# EAGLE board xio (EAGLE 5.02)
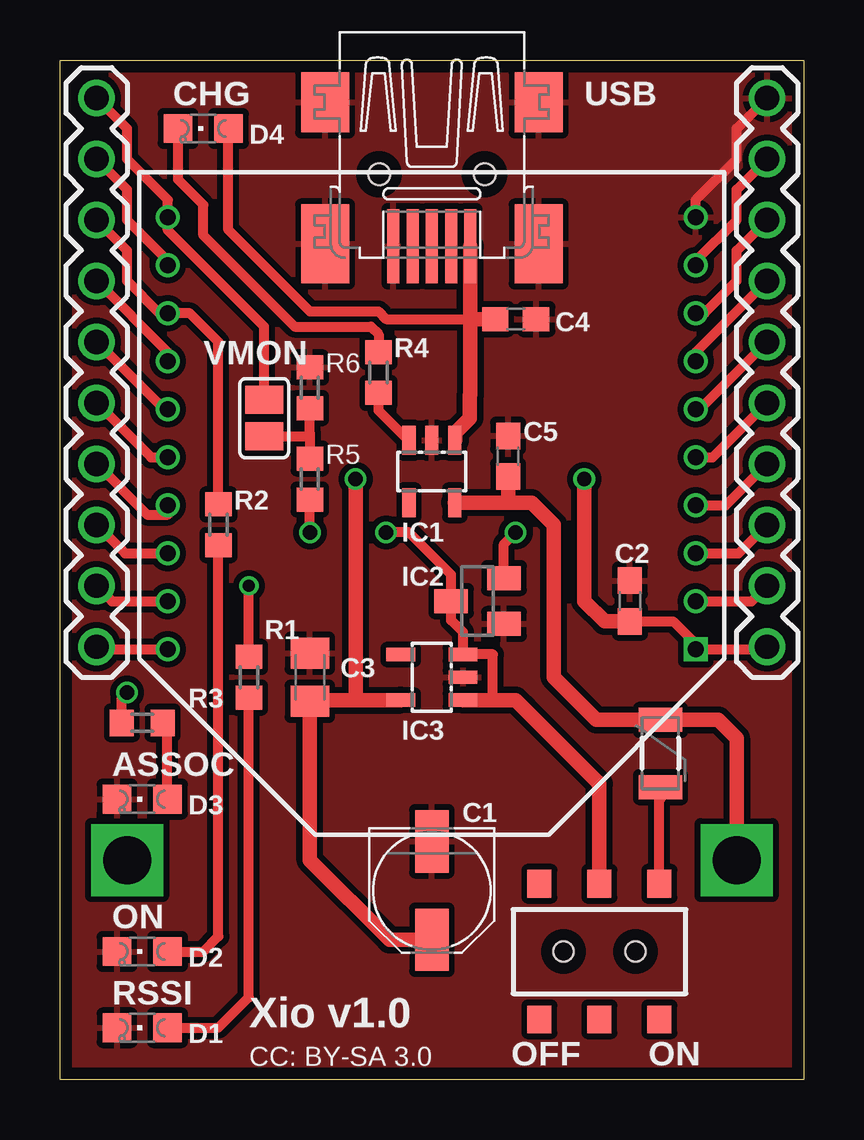
[diagram p0: board, top side]
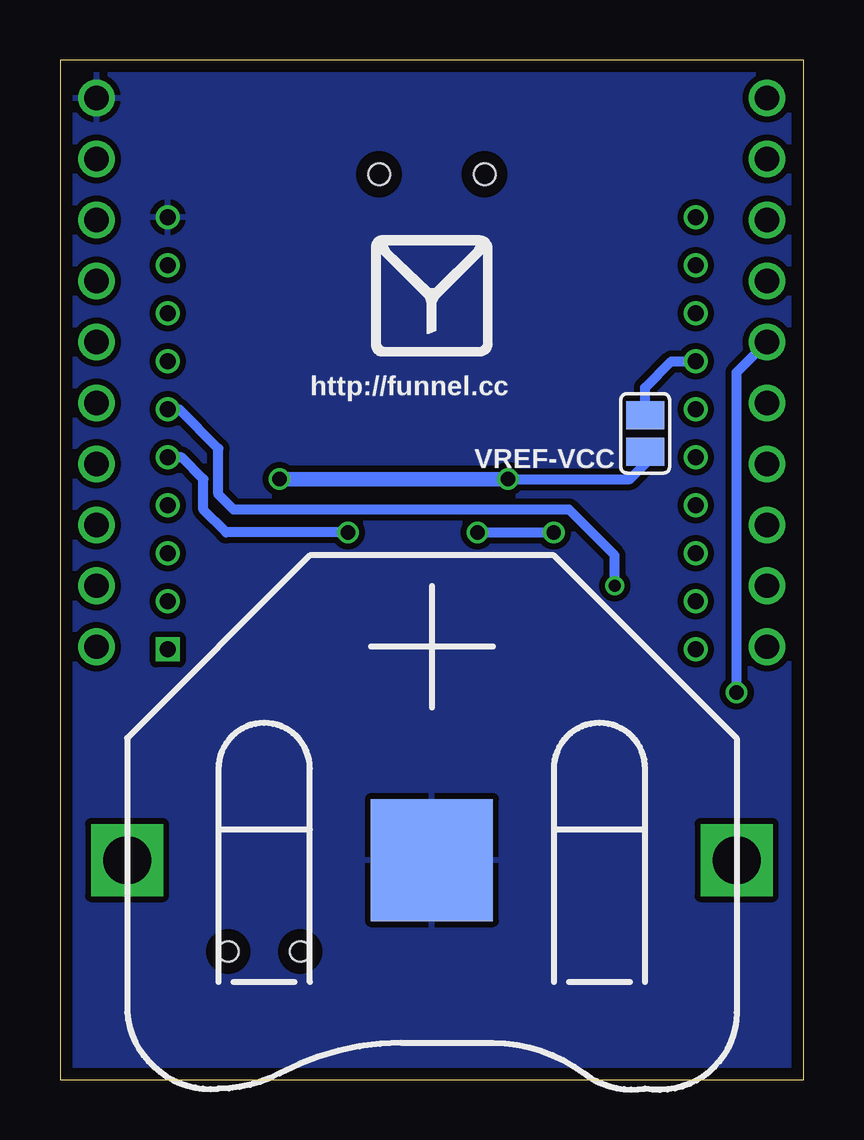
[diagram p1: board, bottom side, seen from below]

Size 30.99 x 42.48 mm. Coordinates in mm from the lower left corner, seen from the top.
Outline: 30.99,42.48 30.99,0 0,0 0,42.48 30.99,42.48
Copper layers (1*16): Top 0.035mm / dielectric 1.5mm / Bottom 0.035mm
Design rules "p_ban_2layer *": minimum track width 5mil, minimum drill 0.3mm, track to track 5mil, track to pad 5mil, pad to pad 5mil, via to via 5mil, smd to smd 5mil, copper to edge 0.5mm, drill to drill 0.3mm, minimum pad ring 0.15mm, minimum via ring 0.15mm, stop-mask expansion 4mil, vias tented up to drill 0.35mm, thermal gap 10mil
Net classes: 0 Default: width 0.203 mm; 1 VCC: width 0.381 mm; 2 LEDPower: width 0.203 mm; 3 ButtonSignal: width 0.203 mm

## Footprints (pad centres in the part's own frame; a part is rotated, then mirrored left to right if it is on the bottom)
3009 = drill 2 square: +@1 12.7,0; +@2 -12.7,0 | smd 5.08 x 5.08: - 0,0
PANASONIC_C = smd 2.6 x 1.4: + 2.05,0; - -2.05,0
0603 = smd 1.1 x 1: 1 -0.85,0; 2 0.85,0
C0805K = smd 1.3 x 1.6: 1 -1,0; 2 1,0
CHIPLED_0805 = smd 1.2 x 1.2: A 0,-1.05; C 0,1.05
PTC-1206 = smd 1 x 1.8: 1 -1.4,0; 2 1.4,0
SOT23-5 = smd 0.55 x 1.2: 1 -0.95,-1.3; 2 0,-1.3; 3 0.95,-1.3; 4 0.95,1.3; 5 -0.95,1.3
SOT23 = smd 1 x 1.4: 1 -0.95,-1.1; 2 0.95,-1.1; 3 0,1.1
1X10 = drill 1.016 round: 1 0,0; 2 2.54,0; 3 5.08,0; 4 7.62,0; 5 10.16,0; 6 12.7,0; 7 15.24,0; 8 17.78,0; 9 20.32,0; 10 22.86,0
XBEE = drill 0.66 square: 1 -11,9 | drill 0.66 round: 2 -11,7; 3 -11,5; 4 -11,3; 5 -11,1; 6 -11,-1; 7 -11,-3; 8 -11,-5; 9 -11,-7; 10 -11,-9; 11 11,-9; 12 11,-7; 13 11,-5; 14 11,-3; 15 11,-1; 16 11,1; 17 11,3; 18 11,5; 19 11,7; 20 11,9
R0603 = smd 1 x 1.1: 1 -0.85,0; 2 0.85,0
SJ-NO = smd 1.168 x 1.6: 1 -0.762,0; 2 0.762,0
AYZ0202 = smd 1 x 1.15: 1 -2.5,2.825; 2 0,2.825; 3 2.5,2.825; 4 -2.5,-2.825; 5 0,-2.825; 6 2.5,-2.825 | hole 0.85: 1.5,0; -1.5,0
32005-201 = smd 3.1 x 0.5: 1 3,1.6; 2 3,0.8; 3 3,0; 4 3,-0.8; 5 3,-1.6 | smd 2.5 x 2: M1 -3,-4.45; M2 -3,4.45 | smd 3.3 x 2: M3 2.9,4.45; M4 2.9,-4.45 | hole 0.9: 0,2.2; 0,-2.2

## Placement (x,y rotation side)
BAT  2450  [3009]  15.49,9.14 180 bottom
C1  10u  [PANASONIC_C]  15.49,7.87 270 top
C2  0.1uF  [0603]  23.75,19.94 90 top
C3  10µ  [C0805K]  10.41,16.76 90 top
C4  1.0uF  [0603]  18.99,31.69 0 top
C5  1.0uF  [0603]  18.67,25.97 90 top
D1  Green  [CHIPLED_0805]  3.43,2.16 90 top
D2  Red  [CHIPLED_0805]  3.43,5.33 90 top
D3  Red  [CHIPLED_0805]  3.43,11.68 90 top
D4  Orange  [CHIPLED_0805]  5.97,39.62 90 top
F1  500mA  [PTC-1206]  25.02,13.59 270 top
IC1  MAX1555  [SOT23-5]  15.49,25.34 180 top
IC2  MAX809TEUR  [SOT23]  17.4,19.94 90 top
IC3  MIC5205-3.3  [SOT23-5]  15.49,16.76 90 top
JP1  M100.1  [1X10]  1.52,18.03 90 top
JP2  M100.1  [1X10]  29.46,18.03 90 top
M1  XBEE  [XBEE]  15.49,26.92 180 top
R1  1k  [R0603]  7.87,16.76 90 top
R2  1k  [R0603]  6.6,23.11 90 top
R3  1k  [R0603]  3.43,14.86 180 top
R4  1k  [R0603]  13.27,29.46 90 top
R5  1k  [R0603]  10.41,25.02 270 top
R6  1k  [R0603]  10.41,28.83 270 top
SJ1  SOLDERJUMPERNO  [SJ-NO]  6.6,26.92 270 bottom
SJ2  SOLDERJUMPERNO  [SJ-NO]  8.51,27.56 90 top
SW1  AYZ0202  [AYZ0202]  22.48,5.33 0 top
U$1  [FUNNEL_LOGO_TOP_SMALL]  15.49,32.64 0 bottom
USB  MINI-USB-SCHIELD-32005-201  [32005-201]  15.49,37.72 270 top

## Library data of the parts
BAT = keystone
C1 C3 R1-R6 = rcl
C2 C4 C5 F1 IC1 IC3 JP1 JP2 SJ1 SJ2 SW1 = SparkFun
D1-D4 = led
IC2 = maxim-10
M1 = digi_xbee
U$1 = funnel_logo
USB = con-cypressindustries

## Nets
AD4: JP1.10 M1.11 SJ2.2
DIN: JP2.3 M1.3
DO8: JP2.4 M1.4
DOUT: JP2.2 M1.2
DTR: JP2.9 M1.9
GND: BAT.- C1.- C2.2 C3.2 C4.2 C5.2 D1.C D2.C D3.C IC1.2 IC2.1 IC3.2 JP2.10 M1.10 R6.1 USB.5 USB.M1 USB.M2 USB.M3 USB.M4
N$1: JP1.8 M1.13 R2.2
N$2: JP1.1 M1.20
N$3: D1.A R1.1
N$6: D2.A R2.1
N$7: JP1.2 M1.19
N$8: D4.C R4.2
N$9: F1.2 SW1.3
N$10: JP1.3 M1.18
N$11: IC1.3 R4.1
N$12: JP1.4 M1.17
N$13: JP1.5 M1.16
N$14: JP1.6 M1.15 R3.2
N$15: JP1.7 M1.14 SJ1.1
N$16: JP1.9 M1.12
N$18: D3.A R3.1
N$19: R5.1 R6.2 SJ2.1
PWM0: JP2.6 M1.6 R1.2
PWM1: JP2.7 M1.7
RAW: IC2.3 IC3.1 IC3.3 R5.2 SW1.2
RESERVED: JP2.8 M1.8
RESET#: IC2.2 JP2.5 M1.5
USB_VIN: C4.1 D4.A IC1.1 USB.1
VBATT: BAT.+@1 C5.1 F1.1 IC1.5
VCC [VCC]: C1.+ C2.1 C3.1 IC3.5 JP2.1 M1.1 SJ1.2

## Tracks (layer width: path | path; a pad name or v marks a point on that pad's centre or on a via)
AD4
  Top 0.406: JP1.10 2.79,39.62 2.79,38.35 4.49,36.65 M1.11 4.49,35.38 8.51,31.37 SJ2.2
DIN
  Top 0.406: M1.3 28.27,21.92 JP2.3
DO8
  Top 0.406: M1.4 27.73,23.92 JP2.4
DOUT
  Top 0.406: M1.2 28.81,19.92 JP2.2
DTR
  Top 0.406: M1.9 26.49,34.11 28.19,35.81 28.19,37.08 JP2.9
GND
  Top 0.406: M1.10 26.49,36.65 28.19,38.35 28.19,39.62 JP2.10
  pour Top (isolate 0.254): -1.02,43.43 32,43.43 32,-1.02 -1.02,-1.02
  pour Bottom (isolate 0.254): 0.25,44.7 30.73,44.7 30.73,-1.02 0.25,-1.02
N$1
  Top 0.406: R2.2 6.6,30.73 5.41,31.92 M1.13 4.14,31.92 2.79,33.27 2.79,34.54 JP1.8
N$2
  Top 0.406: M1.20 1.63,17.92 JP1.1
N$3
  Top 0.406: D1.A 6.6,2.16 7.87,3.43 R1.1
N$6
  Top 0.406: D2.A 5.97,5.33 6.6,5.97 R2.1
N$7
  Top 0.406: M1.19 2.17,19.92 JP1.2
N$8
  Top 0.406: D4.C 4.92,37.5 5.97,36.45 5.97,35.18 9.78,31.37 12.95,31.37 13.27,31.05 R4.2
N$9
  Top 0.406: F1.2 25.02,11.68 24.98,11.64 SW1.3
N$10
  Top 0.406: M1.18 2.71,21.92 JP1.3
N$11
  Top 0.406: R4.1 13.27,27.88 14.51,26.64 IC1.3
N$12
  Top 0.406: M1.17 4.49,23.54 3.63,23.54 JP1.4
N$13
  Top 0.406: M1.16 3.79,25.92 JP1.5
N$14  (via drill 0.6)
  Top 0.406: R3.2 2.58,15.91 v2.79,16.13 | M1.15 4.33,27.92 JP1.6
  Bottom 0.406: v2.79,16.13 2.79,29.46 JP1.6
N$15
  Top 0.406: M1.14 4.49,30.3 JP1.7
  Bottom 0.406: M1.14 5.51,29.92 6.6,28.83 SJ1.1
N$16
  Top 0.406: M1.12 4.49,34.11 2.79,35.81 2.79,37.08 JP1.9
N$18
  Top 0.406: R3.1 4.06,14.86 4.48,14.44 D3.A
N$19
  Top 0.406: 10.41,25.65 R5.1 10.41,26.92 | 10.41,26.92 R6.2 | SJ2.1 10.29,26.8 10.41,26.92
PWM0  (via drill 0.5)
  Top 0.406: R1.2 v7.87,20.57 | M1.6 26.65,27.92 JP2.6
  Bottom 0.406: M1.6 26.02,27.92 24.38,26.29 24.38,24.38 23.75,23.75 9.78,23.75 7.87,21.84 v7.87,20.57
PWM1
  Top 0.406: M1.7 26.49,30.3 JP2.7
RAW  (via drill 0.6)
  Top 0.406: v13.59,22.8 14.54,22.8 16.3,21.04 IC2.3 16.3,19.13 16.79,18.64 IC3.3 18.03,17.71 18.03,15.81 | 10.41,24.38 R5.2 v10.41,22.8 | 19.3,15.49 19.13,15.66
  Top 0.61: IC3.1 18.03,15.81 18.98,15.81 19.3,15.49 22.48,12.32 SW1.2
  Bottom 0.406: v13.59,22.8 v10.41,22.8
RESERVED
  Top 0.406: M1.8 26.84,31.92 28.19,33.27 28.19,34.54 JP2.8
RESET#  (via drill 0.6)
  Top 0.406: M1.5 27.19,25.92 JP2.5 | IC2.2 18.5,22.31 v18.99,22.8
  Bottom 0.406: v18.99,22.8 24.07,22.8 25.02,23.75 25.02,25.02 25.92,25.92 M1.5
USB_VIN
  Top 0.406: 16.48,26.64 IC1.1 | D4.A 7.02,35.4 10.41,32 13.27,32 13.59,31.69 17.09,31.69
  Top 0.61: 17.09,31.69 17.09,28.52 17.08,28.51 17.08,27.56 16.48,26.95 16.48,26.64 | 17.09,31.69 USB.1 | 17.09,31.69 C4.1
VBATT
  Top 0.61: 18.67,24.04 IC1.5 | 18.67,24.04 C5.1 18.67,25.34 | 18.67,24.04 19.65,24.04 20.57,23.11 20.57,20.57 20.57,16.76 22.35,14.99 F1.1 27.43,14.99 28.19,14.22 BAT.+@1
VCC  (via drill 0.6)
  Top 0.406: M1.1 29.35,17.92 JP2.1 | C2.1 25.55,19.09 26.61,18.03
  Top 0.61: 26.61,18.03 M1.1 | C2.1 22.69,19.09 21.84,19.94 v21.84,25.02 | 10.41,15.49 C3.1 | 12.32,15.81 10.73,15.81 10.41,15.49 | 12.32,15.81 IC3.5 | 12.32,15.81 v12.32,25.02 | 10.41,15.49 10.41,9.14 13.73,5.82 C1.+
  Bottom 0.406: SJ1.2 6.6,25.65 7.24,25.02 v12.32,25.02
  Bottom 0.61: v12.32,25.02 v21.84,25.02

## Text on the board
tPlace: CHG | USB | VMON | ASSOC | ON | RSSI | Xio v1.0 | CC: BY-SA 3.0 | OFF | ON
bPlace: http://funnel.cc
bNames: VREF-VCC